# Altium PCB ZOWI_Ultrasonic.PcbDoc
Units mm, origin at the board's own origin, x right, y up, seen from the top; angles counter-clockwise.
Board outline 56.79 x 26.01 mm, 2 copper layers (Top Layer, Bottom Layer), stack 1.18 mm thick; 63 components, 43 nets, 164 pads, 61 vias.
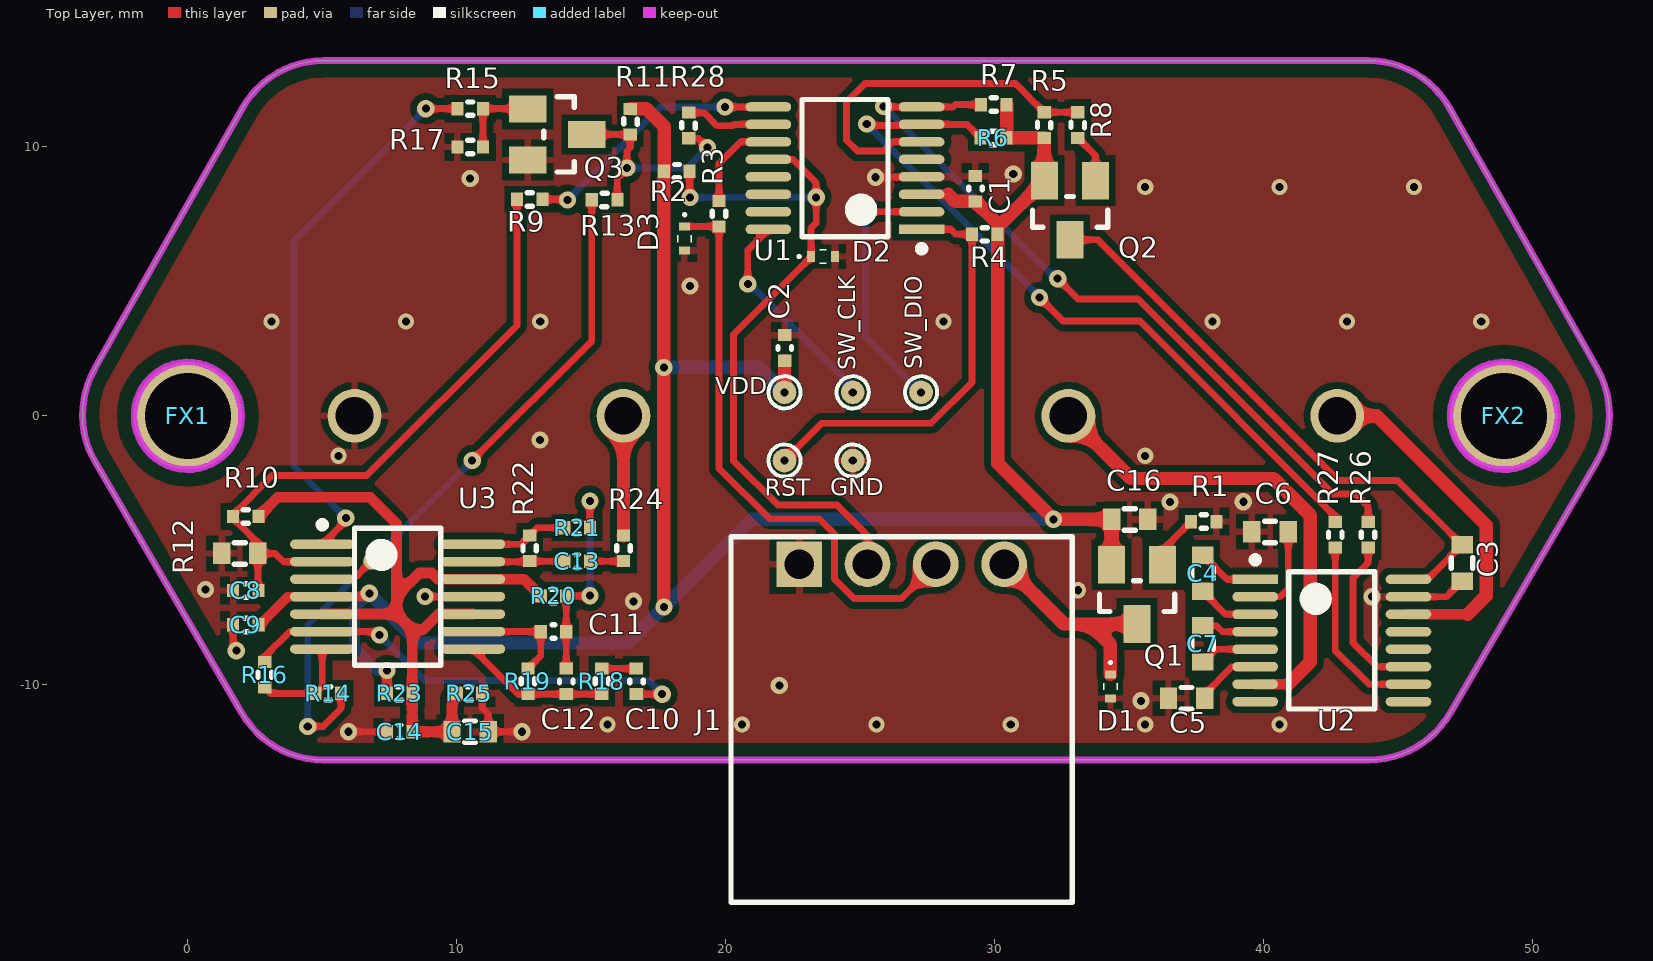
[diagram p0: Top Layer view]
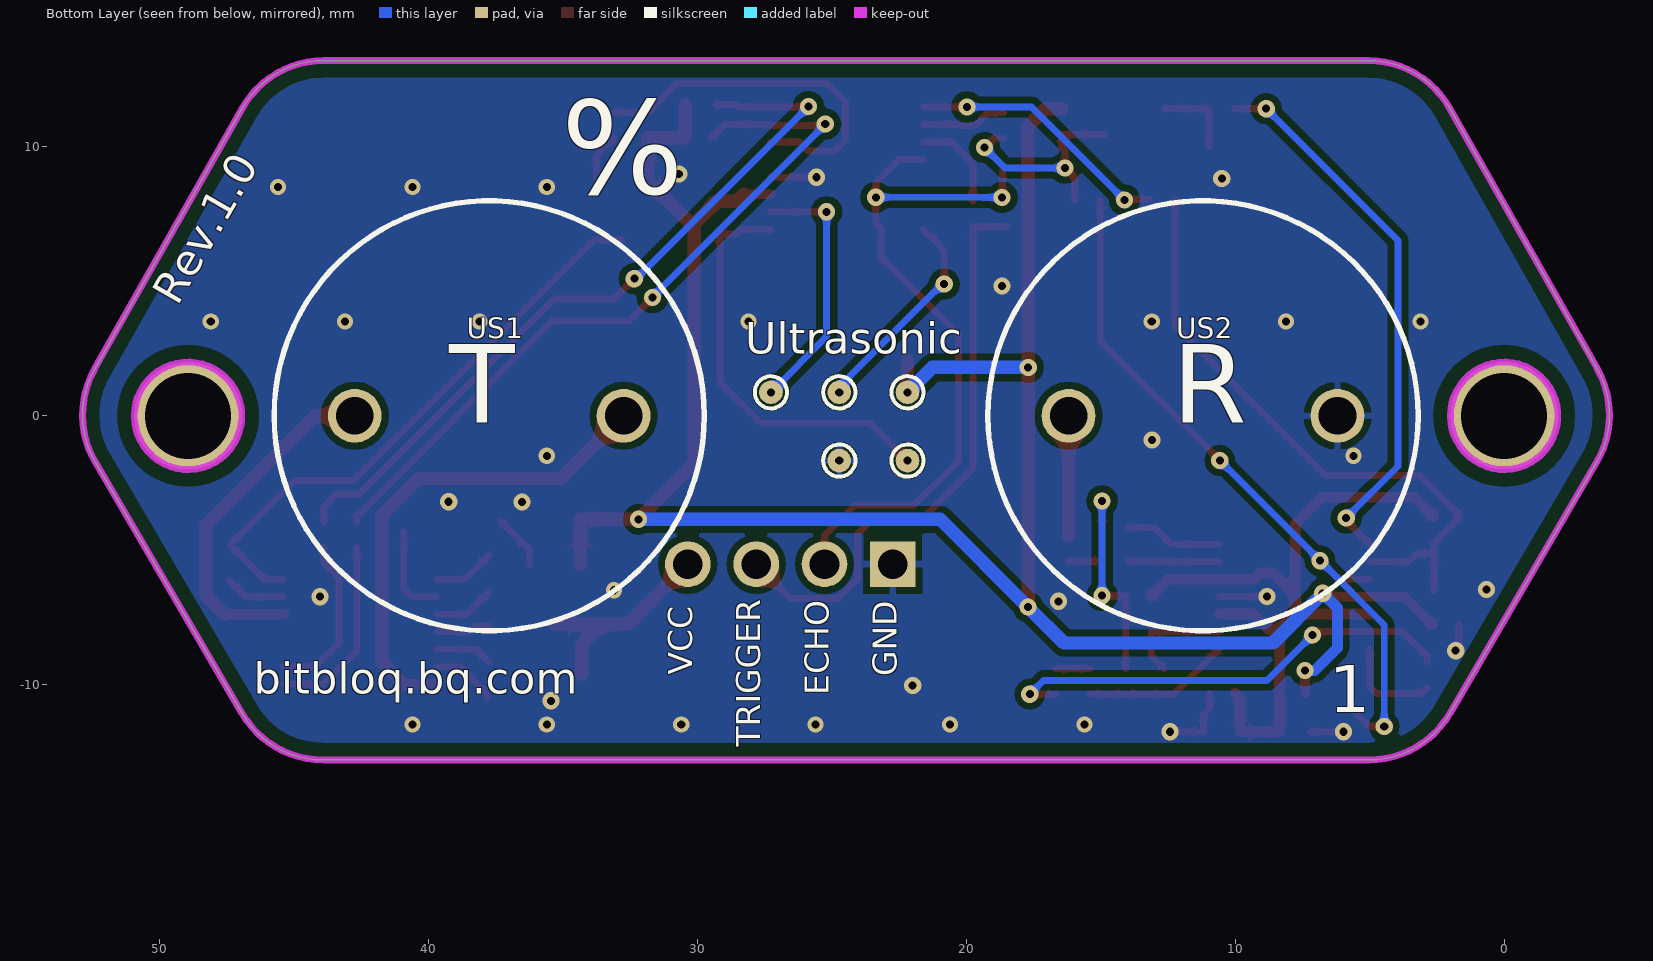
[diagram p1: Bottom Layer view, seen from below]
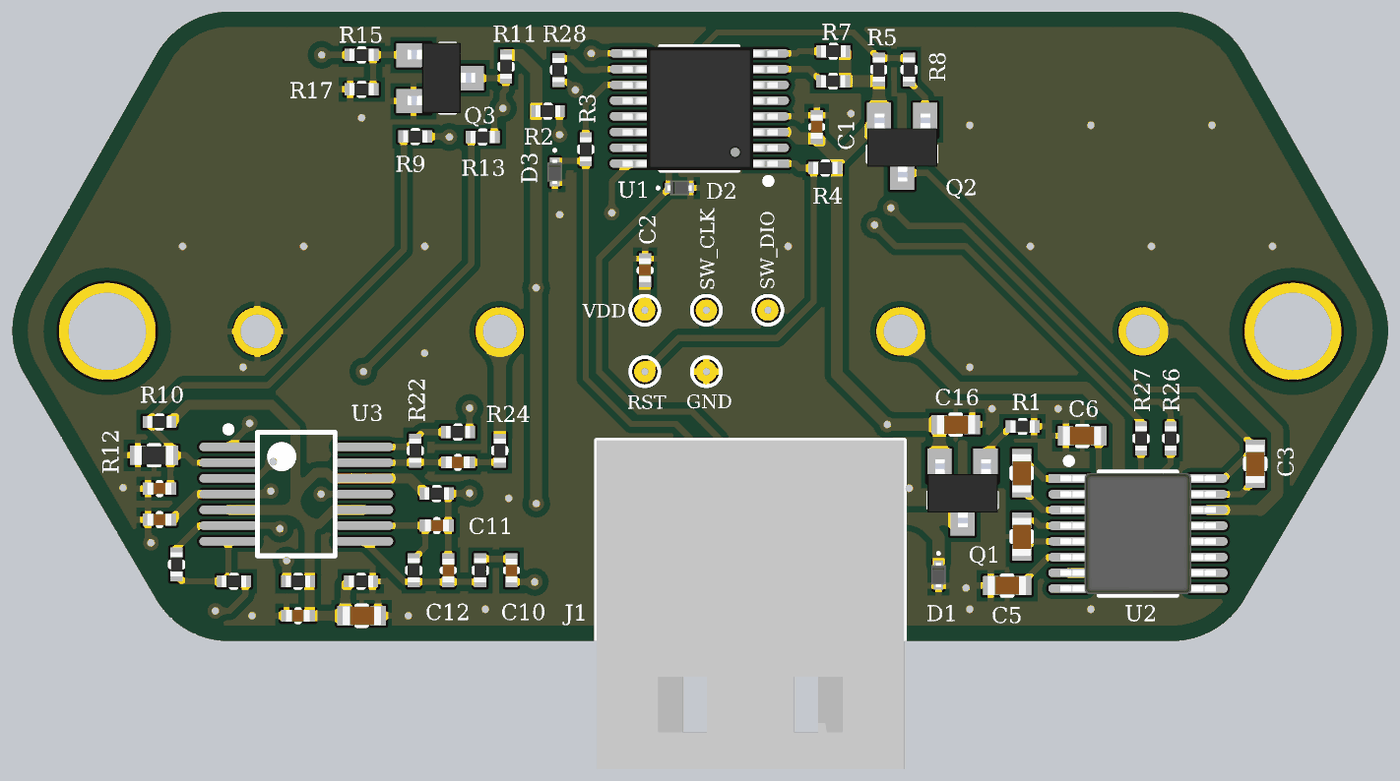
[diagram p2: 3D render of the assembled board from above, using the file's embedded part models]

## Layer stack, top to bottom
Top Solder: solder mask 0.0102, Solder Resist, Dk 3.5
Top Layer: signal copper 0.035
Dielectric 1: dielectric 1.1097, FR-4, Dk 4.8
Bottom Layer: signal copper 0.035
Bottom Solder: solder mask 0.0102, Solder Resist, Dk 3.5

## Board outline
2.021,-11.072 -3.441,-1.724 cw(c-0.436,0.031) -3.465,1.746 2.029,11.449 cw(c5.058,9.734) 5.058,13.214 43.9,13.214 cw(c43.9,9.734) 46.929,11.449 52.423,1.746 cw(c49.394,0.031) 52.399,-1.724 46.937,-11.072 cw(c43.932,-9.316) 43.932,-12.796 5.026,-12.796 cw(c5.026,-9.316)

## Design rules (kind name [scope] priority, off if disabled: settings)
Clearance Clearance_KO [OnLayer('Keep-Out Layer')] p1: gap=0.5
Clearance [All] p2: gap=0.254
HoleSize [All] p1: absolutevalues=TRUE maxlimit=3.2 minlimit=0.025 maxpercent=80.000 minpercent=20.000
MinimumSolderMaskSliver [All] p1: minsoldermaskwidth=0
PolygonConnect PolygonConnect_Via [(ViaDiameter >= 0)] p1: connectstyle=Direct reliefconductorwidth=0.254 reliefentries=4 polygonreliefangle="90 Angle" airgapwidth=0.254
PolygonConnect [All] p2: connectstyle=Relief reliefconductorwidth=0.254 reliefentries=4 polygonreliefangle="90 Angle" airgapwidth=0.254
RoutingVias [All] p1: holewidth=0.3 width=0.64 viastyle="Through Hole" minholewidth=0.2 minwidth=0.5 maxholewidth=0.3 maxwidth=0.64
SilkToSilkClearance [All] p1: silktosilkclearance=0
SilkToSolderMaskClearance [IsPad] p1: minsilkscreentomaskgap=0 clearancetoexposedcopper=TRUE
SolderMaskExpansion [All] p1: expansion=0.102
Width [All] p1: maxlimit=0.5 minlimit=0.254 preferedwidth=0.254
26 further rules are at their usual default settings.

## Classes and differential pairs
component class MCU: C1 C2 C16 D1 D2 D3 FX1 FX2 GND J1 Q1 R1 R2 R3 R4 R5 R6 R7 R26 R27 R28 RST SWD_CLK SWD_DIO U1 VDD
component class U_Ultrasonic_Receiver: C8 C9 C10 C11 C12 C13 C14 C15 Q3 R9 R10 R11 R12 R13 R14 R15 R16 R17 R18 R19 R20 R21 R22 R23 R24 R25 U3 US2
component class U_Ultrasonic_Transmitter: C3 C4 C5 C6 C7 Q2 R8 U2 US1

## Components (designator, comment, footprint, x,y, rotation, side; value= is the part's Value field where it differs from the comment)
C1 "Capacitor" C0402 29.291,8.448 r270 top
C2 "Capacitor" C0402 22.2,2.525 r270 top
C3 "Capacitor" C0603 47.392,-5.47 r90 top
C4 "Capacitor" C0603 37.749,-5.856 r90 top
C5 "Capacitor" C0603 37.149,-10.506 r0 top
C6 "Capacitor" C0603 40.25,-4.316 r0 top
C7 "Capacitor" C0603 37.749,-8.481 r90 top
C8 "Capacitor" C0402 2.155,-6.496 r0 top
C9 "Capacitor" C0402 2.155,-7.776 r0 top
C10 "Capacitor" C0402 16.683,-9.875 r90 top
C11 "Capacitor" C0402 13.6,-8.025 r180 top
C12 "Capacitor" C0402 14.075,-9.875 r90 top
C13 "Capacitor" C0402 14.475,-5.408 r0 top
C14 "Capacitor" C0402 7.875,-11.75 r0 top
C15 "Capacitor" C0603 10.5,-11.75 r180 top
C16 "Capacitor" C0603 35.031,-3.85 r180 top
D1 "ESD9B5.0ST5G" SOD923 34.314,-10.066 r90 top
D2 "ESD9L5.0ST5G" SOD923 23.625,5.925 r180 top
D3 "ESD9L5.0ST5G" SOD923 18.475,6.592 r90 top
FX1 "Fix Hole" Fix_Hole_3.2mm 0,0 r0 top
FX2 "Fix Hole" Fix_Hole_3.2mm 48.95,0 r0 top
GND "Testpoint" TP_POWER 24.731,-1.665 r270 top
J1 "1x4 MTE Angled Header 2.54mm" "1x4 MTE Angled Header 2.54mm" 22.74,-5.516 r0 top
Q1 "BSS84" SOT23-3 35.306,-6.642 r0 top
Q2 "BSS84" SOT23-3 32.811,7.648 r0 top
Q3 "FDV301N" SOT23-3 13.739,10.464 r90 top
R1 "Resistor" R0402 37.786,-3.932 r0 top
R2 "Resistor" R0402 18.188,9.1 r180 top
R3 "Resistor" R0402 19.755,7.52 r270 top
R4 "Resistor" R0402 29.643,6.752 r0 top
R5 "Resistor" R0402 31.851,10.816 r270 top
R6 "Resistor" R0402 29.963,10.336 r0 top
R7 "Resistor" R0402 29.977,11.575 r0 top
R8 "Resistor" R0402 33.099,10.816 r270 top
R9 "Resistor" R0402 12.715,8.05 r0 top
R10 "Resistor" R0402 2.155,-3.744 r180 top
R11 "Resistor" R0402 16.459,10.944 r90 top
R12 "Resistor" R0603 1.931,-5.12 r0 top
R13 "Resistor" R0402 15.499,8.032 r180 top
R14 "Resistor" R0402 5.225,-10.325 r0 top
R15 "Resistor" R0402 10.5,11.425 r0 top
R16 "Resistor" R0402 2.859,-9.632 r90 top
R17 "Resistor" R0402 10.5,10 r0 top
R18 "Resistor" R0402 15.4,-9.875 r270 top
R19 "Resistor" R0402 12.651,-9.875 r90 top
R20 "Resistor" R0402 13.6,-6.7 r180 top
R21 "Resistor" R0402 14.475,-4.16 r0 top
R22 "Resistor" R0402 12.715,-4.928 r270 top
R23 "Resistor" R0402 7.875,-10.325 r180 top
R24 "Resistor" R0402 16.203,-4.928 r90 top
R25 "Resistor" R0402 10.475,-10.325 r180 top
R26 "Resistor" R0402 43.9,-4.425 r270 top
R27 "Resistor" R0402 42.675,-4.425 r270 top
R28 "Resistor" R0402 18.625,10.8 r90 top
RST "Testpoint" TP_POWER 22.191,-1.665 r270 top
SW_CLK "Testpoint" TP_POWER 24.731,0.875 r270 top (schematic designator SWD_CLK)
SW_DIO "Testpoint" TP_POWER 27.271,0.875 r270 top (schematic designator SWD_DIO)
U1 "MKE04Z8VTG4" TSSOP16#1 24.441,9.214 r90 top
U2 "MAX232EIPWR" TSSOP16#2 42.549,-8.356 r0 top
U3 "LM324PWR" TSSOP14 7.8,-6.725 r0 top
US1 "Ultrasonic" NU40C16 42.75,0 r180 bottom
US2 "Ultrasonic" NU40C16 16.2,0 r180 bottom
VDD "Testpoint" TP_POWER 22.191,0.875 r270 top

## Footprints (in the part's own frame and the unit in brackets; to place one, negate y for a bottom-side part, rotate by r counter-clockwise, add the part's x,y. Pads: shape width x height; smd on the part's side, far side on the other; paste and mask are expansions set on the pad)
"1x4 MTE Angled Header 2.54mm" [mm] "1x4 MTE Angled Header 2.54mm"
  rect 1.7x1.7 hole 1.1: 1(0,0)
  round 1.7 hole 1.1: 2(2.54,0) 3(5.08,0) 4(7.62,0)
  silkscreen extent -2.54,-12.57 10.16,1.02, body extent -2.54,-12.57 10.16,1.02, height 6.96
C0402 [mm] "Chip Capacitor, Body 1.0x0.5mm, IPC High Density"
  rect 0.45x0.5 smd: 1(-0.475,0) 2(0.475,0)
  silkscreen extent -0.05,-0.25 0.05,0.25, body extent -0.51,-0.25 0.49,0.25, height 0.5
C0603 [mm] "Chip Capacitor, Body 1.6x0.8mm, IPC High Density"
  rect 0.65x0.8 smd: 1(-0.675,0) 2(0.675,0)
  silkscreen extent -0.2,-0.4 0.2,0.4, body extent -0.81,-0.4 0.79,0.4, height 0.6
Fix_Hole_3.2mm [mm] "Fix Hole for screwing"
  round 4 hole 3.2: 1(0,0)
NU40C16 [mm] "Ceramic Ultrasonic Sensor"
  round 2 hole 1.4 mask+0.05: 1(0,0) 2(10,0)
  silkscreen extent -3,-8 13,8, body extent -2.98,-8 13.01,8, height 12
R0402 [mm] "Chip Resistor, Body 1.0x0.5mm, IPC High Density"
  rect 0.45x0.5 smd: 1(-0.475,0) 2(0.475,0)
  silkscreen extent -0.1,-0.25 0.1,0.25, body extent -0.5,-0.25 0.5,0.25, height 0.3
R0603 [mm] "Chip Resistor, Body 1.6x0.8mm, IPC High Density"
  rect 0.65x0.8 smd: 1(-0.675,0) 2(0.675,0)
  silkscreen extent -0.2,-0.4 0.2,0.4, body extent -0.81,-0.4 0.79,0.4, height 0.4
SOD923 [mm] "SOD923, 2-Leads, Body 0,80x0,60mm, IPC Medium Density"
  rect 0.3x0.4 smd: A(-0.45,0) K(0.45,0)
  silkscreen extent -0.13,-0.25 0.94,0.25, body extent -0.5,-0.3 0.5,0.3, height 0.4
SOT23-3 [mm] "SOT23, 3-Leads, Body 2.9x1.3mm, Pitch 0.95mm, Lead Span 2.5mm, IPC High Density"
  rect 1x1.4 smd: 1(0.95,1.1) 2(-0.95,1.1) 3(0,-1.1)
  silkscreen extent -1.4,-0.64 1.4,0.51, body extent -1.44,-1.45 1.46,1.35, height 1.07
TP_POWER [mm] "Testpoint 0.3mm"
  round 0.88 / inner round 0.74 / far side round 0.88 hole 0.3 paste-0.425: 1(0,0)
  silkscreen extent -0.6,-0.6 0.6,0.6, body extent -0.41,-0.41 0.41,0.41, height 0.1
TSSOP14 [mm]
  oval 2.4x0.35 smd: 1(-2.8,1.95) 2(-2.8,1.3) 3(-2.8,0.65) 4(-2.8,0) 5(-2.8,-0.65) 6(-2.8,-1.3) 7(-2.8,-1.95) 8(2.8,-1.95) 9(2.8,-1.3) 10(2.8,-0.65) 11(2.8,0) 12(2.8,0.65) 13(2.8,1.3) 14(2.8,1.95)
  silkscreen extent -2.92,-2.55 1.6,2.8, body extent -2.25,-2.55 2.25,2.55, height 1.05
TSSOP16#1 [mm] "TSSOP, 16-Leads, Body 5.0x4.4mm, Pitch 0.65mm"
  rect 0.35x1.7 smd: 1(-2.275,-2.85)
  oval 0.35x1.7 smd: 2(-1.625,-2.85) 3(-0.975,-2.85) 4(-0.325,-2.85) 5(0.325,-2.85) 6(0.975,-2.85) 7(1.625,-2.85) 8(2.275,-2.85) 9(2.275,2.85) 10(1.625,2.85) 11(0.975,2.85) 12(0.325,2.85) 13(-0.325,2.85) 14(-0.975,2.85) 15(-1.625,2.85) 16(-2.275,2.85)
  silkscreen extent -3.12,-2.98 2.55,1.6, body extent -2.56,-3.23 2.54,3.17, height 1.2
TSSOP16#2 [mm] "TSSOP 16 leads, 5.0x4.4, lead space 0.65"
  rect 1.7x0.35 smd: 1(-2.85,2.275)
  oval 1.7x0.35 smd: 2(-2.85,1.625) 3(-2.85,0.975) 4(-2.85,0.325) 5(-2.85,-0.325) 6(-2.85,-0.975) 7(-2.85,-1.625) 8(-2.85,-2.275) 9(2.85,-2.275) 10(2.85,-1.625) 11(2.85,-0.975) 12(2.85,-0.325) 13(2.85,0.325) 14(2.85,0.975) 15(2.85,1.625) 16(2.85,2.275)
  silkscreen extent -2.97,-2.55 1.6,3.12, body extent -3.21,-2.5 3.21,2.5, height 0.98

## Part data
C1 C2 C9 C14: library part C0402_100nF_16V_±10%, "Capacitor SMD"
C3 C4 C5 C6 C7 C15: library part C0603_1uF_16V_±10%, "Capacitor SMD"
C8 C10 C13: library part C0402_10nF_16V_±10%, "Capacitor SMD"
C11 C12: library part C0402_1nF_16V_±10%, "Capacitor SMD"
C16: library part C0603_10uF_16V_±20%, "Capacitor SMD"
D1: library part "TVS 5Vdc Bidir", "Protection, Bidirectional Transient Suppression Diodes"
D2 D3: library part "TVS 5Vdc Low Cap", "Protection, Transient Suppression Diode"
FX1 FX2: library part FX_3.2
GND RST SW_CLK SW_DIO VDD: library part TP_POWER
J1: library part CON_MTE_Angled_HDR_THT2.54_4, "Connector, 1x4 MTE Angled Header 2.54mm"
Q1 Q2: "PFET"
Q3: "NFET"
R1 R2 R4 R5 R6 R7 R11 R15 R18 R24: library part R0402_10k_0.063W_±5%, "Resistor, SMD"
R3 R8 R20: library part R0402_1k_0.063W_±5%, "Resistor, SMD"
R9: library part R0402_75k_0.063W_±5%, "Resistor, SMD"
R10 R13: library part R0402_120k_0.063W_±5%, "Resistor, SMD"
R12: library part R0603_1M_0.1W_±5%, "Resistor, SMD"
R14 R17 R21: library part R0402_3k9_0.063W_±5%, "Resistor, SMD"
R16 R22: library part R0402_56k_0.063W_±5%, "Resistor, SMD"
R19: library part R0402_20k_0.063W_±5%, "Resistor, SMD"
R23 R25: library part R0402_10k_0.063W_±1%, "Resistor, SMD"
R26 R27 R28: library part R0402_220R_0.063W_±5%, "Resistor, SMD"
U1: "Processor, 32-bit microcontroller"
U2: "Dual RS-232 Driver/Receiver"
U3: "Operational Amplifier Quadruple"
US1: library part NU40C16T-2, "Ultrasonic Sensor"
US2: library part NU40C16R-2, "Ultrasonic Sensor"

## Via types
v1: diameter 0.64, hole 0.3, Top Layer to Bottom Layer, 42 vias
v2: diameter 0.6, hole 0.3, Top Layer to Bottom Layer, 19 vias

## Nets (pads, with @x,y where several pads share a name; then routed paths per layer and width w, separated by ;. In a path a pad name is that pad's centre, name@x,y a point inside that pad or via, vN(x,y) a via of type N, cw(c..) or ccw(c..) an arc to the next point about the centre after c; other vN are vias at no path point)
5V: C1.2 C2.2 C9.2 C16.2 Q1.2 Q2.2 R2.2 R4.2 R5.2 R6.2 R7.2 R11.2 R23.2 U1.3 U3.4 VDD.1 | length 88.5
  Top Layer w0.35: C9.2 2.672,-7.776 3.723,-6.725 U3.4 6.625,-6.725 v1(6.75,-6.6) ; R23.2 7.403,-10.322 v1(7.403,-9.472) ; U1.3 28.236,8.239
  Top Layer w0.5: R11.2 17.056,11.419 17.713,10.762 R2.2 ; v1@17.704,-7.114 v1(17.704,1.8) R2.2@17.704,9.16 ; VDD.1 C2.2@22.191,2.041 ; 28.276,8.239 28.542,7.973 C1.2 30.118,7.146 ; R7.2 30.452,10.35 30.461,10.341 R5.2 31.851,8.758 Q2.2 30.259,7.146 30.118,7.146 ; Q1.2 C16.2 v1(32.2,-3.85) 30.118,-1.768 R4.2 30.118,7.146
  Bottom Layer w0.4: v1(6.75,-6.6) 6.2,-7.15 6.2,-8.625 7.047,-9.472 v1(7.403,-9.472)
  Bottom Layer w0.5: v1(6.75,-6.6) 8.599,-8.45 16.371,-8.45 v1(17.707,-7.114) 20.971,-3.85 v1(32.2,-3.85) ; v1(17.704,1.8) 21.266,1.8 VDD.1
#RESET: R4.1 RST.1 U1.1 | length 15.7
  Top Layer w0.254: RST.1 23.581,-0.275 27.65,-0.275 29.168,1.243 R4.1 28.573,6.752 28.386,6.939 U1.1 U1.1@27.291,6.891
ECHO: D2.K J1.2 R2.1 U1.12 | length 26.7
  Top Layer w0.254: R2.1 18.663,8.137 v1(18.675,8.125) ; U1.12 22.504,9.539 23.371,8.672 v1(23.371,8.128) 23.371,7.168 23.181,6.978 23.181,5.906 20.3,3.025 20.3,-1.675 21.942,-3.317 24.142,-3.317 25.28,-4.455 J1.2
  Bottom Layer w0.254: v1(18.675,8.125) 19.375,8.125 19.378,8.128 v1(23.371,8.128) v1@23.344,8.101
EN_TRANSMITTER: R5.1 R8.1 U1.6 | length 13.8
  Top Layer w0.254: U1.6 26.214,10.189 25.875,9.85 24.9,9.85 24.5,10.25 24.5,11.675 25.181,12.356 30.786,12.356 R5.1 R8.1
GND: C1.1 C2.1 C3.1 C5.1 C6.1 C8.1 C9.1 C14.1 C15.1 C16.1 D1.A D2.A D3.A GND.1 J1.1 Q3.2 R1.2 R12.1 R17.1 R25.1 U1.4 U2.15 U3.11 US2.2 | length 10.8
  Top Layer w0.254: C9.1 1.68,-8.613 v1(1.803,-8.736) ; v1(5.975,-11.75) C14.1@7.2,-11.75 ; v1(8.825,-6.725) U3.11 ; R25.1 10.95,-10.875 11.179,-11.104 11.179,-11.696 11.15,-11.725 C15.1 v1(12.425,-11.75) ; v1(25.575,8.875) 27.277,8.875 U1.4 ; U2.15 46.807,-6.731 C3.1
  other v1: 35.45,-10.6 22,-10.025 16.575,-6.9 44.042,-6.727 0.651,-6.464 36.525,-3.2 39.258,-3.196 13.1,-0.9 18.675,4.825 10.5,8.825 30.7,9
  other v2: 15.607,-11.486 20.607,-11.486 25.607,-11.486 30.607,-11.486 35.607,-11.486 40.607,-11.486 33.107,-6.486 5.607,-1.486 35.607,-1.486 3.107,3.514 8.107,3.514 13.107,3.514 28.107,3.514 38.107,3.514 43.107,3.514 48.107,3.514 35.607,8.514 40.607,8.514 45.607,8.514
IN_REC: R28.2 U1.10 | length 3.2
  Top Layer w0.254: R28.2 19.201,11.275 19.689,10.787 20.269,10.787 20.321,10.839 U1.10
NetC3_2: C3.2 Q2.3 U2.16 | length 21.8
  Top Layer w0.254: Q2.3 33.852,6.548 42.8,-2.4 44.997,-2.4 C3.2 46.107,-6.081 U2.16
NetC4_1: C4.1 U2.3 | length 2.3
  Top Layer w0.254: C4.1 38.599,-7.381 U2.3
NetC4_2: C4.2 U2.1 | length 2.3
  Top Layer w0.254: C4.2 38.649,-6.081 U2.1
NetC5_2: C5.2 U2.6 | length 2.5
  Top Layer w0.254: C5.2 37.824,-10.344 38.838,-9.331 U2.6
NetC6_2: C6.2 U2.2 | length 3.5
  Top Layer w0.254: U2.2 40.613,-6.731 40.93,-6.413 40.93,-4.321 C6.2
NetC7_1: C7.1 U2.5 | length 2.1
  Top Layer w0.254: C7.1 38.224,-8.681 U2.5
NetC7_2: C7.2 U2.4 | length 2
  Top Layer w0.254: C7.2 38.249,-7.806 38.474,-8.031 U2.4
NetC8_2: C8.2 R9.1 R10.2 R12.2 U3.2 | length 23.9
  Top Layer w0.254: C8.2 2.606,-6.472 R12.2 ; U3.2 3.548,-5.425 3.243,-5.12 R12.2 ; R9.1 12.24,3.365 6.65,-2.225 3.135,-2.225 1.68,-3.68 R10.2 1.68,-3.808 2.606,-4.734 R12.2
NetC10_1: C10.1 R16.2 U3.6 | length 17.3
  Top Layer w0.254: R16.2 2.859,-8.96 3.794,-8.025 U3.6 6.999,-8.025 v1(7.125,-8.15) ; C10.1@16.683,-10.348 16.688,-10.353 v1(17.643,-10.353)
  Bottom Layer w0.254: v1(7.125,-8.15) 8.815,-9.841 17.131,-9.841 v1(17.643,-10.353)
NetC10_2: C10.2 R18.1 | length 1.3
  Top Layer w0.254: R18.1 C10.2
NetC11_1: C11.1 C12.2 R20.1 R21.2 | length 8.1
  Top Layer w0.254: C12.2 C11.1 R20.1 14.943,-6.7 v1(14.955,-6.688) ; R21.2 14.955,-4.155 v1(14.955,-3.168)
  Bottom Layer w0.254: v1(14.955,-6.688) v1(14.955,-3.168)
NetC11_2: C11.2 R19.2 U3.9 | length 4.1
  Top Layer w0.254: U3.9 C11.2 13.125,-8.926 R19.2
NetC13_1: C13.1 R22.2 U3.13 | length 3.4
  Top Layer w0.254: U3.13 R22.2@12.715,-5.425 ; R22.2 12.72,-5.408 C13.1
NetC13_2: C13.2 R24.1 | length 1.3
  Top Layer w0.254: C13.2 16.198,-5.408 R24.1
NetD1_K: D1.K J1.4 Q1.3 | length 8.1
  Top Layer w0.5: J1.4 32.585,-7.742 33.542,-7.742 ; D1.K 34.314,-8.514 33.542,-7.742 ; Q1.3 33.542,-7.742
NetD3_K: D3.K J1.3 R3.2 | length 21.9
  Top Layer w0.254: D3.K@18.475,7.045 R3.2 19.755,-1.955 21.625,-3.825 23.475,-3.825 24.049,-4.399 24.049,-6.074 24.775,-6.8 26.536,-6.8 J1.3
NetQ1_1: Q1.1 R1.1 | length 2
  Top Layer w0.254: Q1.1 36.256,-4.987 R1.1
NetQ2_1: Q2.1 R8.2 | length 1.9
  Top Layer w0.254: R8.2 33.761,9.679 Q2.1
NetQ3_1: Q3.1 R15.2 R17.2 | length 3.1
  Top Layer w0.254: R17.2 R15.2 12.628,11.425 Q3.1
NetQ3_3: Q3.3 R11.1 R13.1 R28.1 | length 8.4
  Top Layer w0.254: Q3.3 16.454,10.464 16.454,9.979 16.331,9.856 v1(16.331,9.216) 15.974,8.859 R13.1 ; R28.1 18.975,10.325 v1(19.325,9.975)
  Bottom Layer w0.254: v1(16.331,9.216) 18.566,9.216 v1(19.325,9.975)
NetR13_2: R13.2 R14.2 U3.3 | length 28.2
  Top Layer w0.254: v1(4.459,-11.552) 5.035,-11.552 5.7,-10.887 R14.2 ; U3.3 6.161,-6.075 v1(6.85,-5.386) ; v1(10.575,-1.661) 15.024,2.788 R13.2
  Bottom Layer w0.254: v1(4.459,-11.552) 4.459,-7.777 v1(6.85,-5.386) v1(10.575,-1.661)
NetR24_2: R24.2 US2.1 | length 4.5
  Top Layer w0.5: R24.2@16.2,-4.45 R24.2 16.203,-0.003 US2.1
NetR26_2: R26.2 U2.11 | length 6.2
  Top Layer w0.254: R26.2 43.9,-5.466 43.341,-6.026 43.341,-8.441 44.231,-9.331 U2.11
NetR27_2: R27.2 U2.10 | length 7.1
  Top Layer w0.254: R27.2 42.675,-8.725 43.931,-9.981 U2.10
NetU2_7: U2.7 US1.2 | length 18.4
  Top Layer w0.4: U2.7 40.924,-9.981
  Top Layer w0.5: US1.2 35.081,-2.331 40.378,-2.331 41.754,-3.707 41.754,-9.151 40.924,-9.981
NetU2_14: U2.14 US1.1 | length 12.7
  Top Layer w0.4: U2.14 47.599,-7.381
  Top Layer w0.5: US1.1@43.1,0 44.225,0 48.296,-4.071 48.296,-6.684 47.599,-7.381
OUT_REC: R9.2 U1.9 | length 9.8
  Top Layer w0.254: R9.2 14.105,8.05 v1(14.123,8.032) ; v1(19.979,11.488) 21.59,11.488 U1.9
  Bottom Layer w0.254: v1(14.123,8.032) 17.579,11.488 v1(19.979,11.488)
OUTA: R15.1 U3.1 | length 20.6
  Top Layer w0.254: U3.1 5.925,-3.85 v1(5.875,-3.8) ; v1(8.85,11.425) R15.1
  Bottom Layer w0.254: v1(5.875,-3.8) 3.95,-1.875 3.95,6.525 v1(8.85,11.425)
OUTB: R14.1 R16.1 U3.7 | length 3.7
  Top Layer w0.254: R16.1 3.077,-10.325 R14.1 5,-10.075 U3.7
OUTC: C12.1 R18.2 R19.1 U3.8 | length 5.7
  Top Layer w0.254: U3.8@10.764,-8.675 U3.8 12.275,-10.35 R19.1 C12.1 R18.2
OUTD: R21.1 R22.1 U3.14 | length 3.7
  Top Layer w0.254: U3.14 12.393,-4.775 R22.1 13.008,-4.16 R21.1
PULSES_1: R7.1 R26.1 U1.8 | length 28.2
  Top Layer w0.254: v1(25.875,11.5) 25.886,11.489 U1.8 28.464,11.489 28.55,11.575 R7.1@29.302,11.575 ; v1(32.352,5.1) 33.102,4.35 35.332,4.35 42.59,-2.908 43.433,-2.908 43.9,-3.375 R26.1
  Bottom Layer w0.254: v1(25.875,11.5) 32.275,5.1 v1(32.352,5.1)
PULSES_2: R6.1 R27.1 U1.7 | length 28.2
  Top Layer w0.254: v1(25.25,10.85) 25.301,10.799 27.291,10.799 U1.7 28.985,10.839 R6.1 ; v1(31.675,4.4) 32.55,3.525 35.415,3.525 42.675,-3.735 R27.1
  Bottom Layer w0.254: v1(25.25,10.85) 31.675,4.425 v1(31.675,4.4)
SWD_CLK: SW_CLK.1 U1.16 | length 8
  Top Layer w0.254: v1(20.826,4.9) 20.826,6.174 U1.16
  Bottom Layer w0.254: v1(20.826,4.9) 20.903,4.9 SW_CLK.1@24.83,0.974
SWD_DIO: SW_DIO.1 U1.2 | length 9.7
  Top Layer w0.254: v1(25.2,7.589) U1.2
  Bottom Layer w0.254: v1(25.2,7.589) 25.2,2.946 SW_DIO.1
TRIGGER: R3.1 U1.11 | length 3.6
  Top Layer w0.254: R3.1 19.755,9.389 20.555,10.189 U1.11
VREF: C14.2 C15.2 R10.1 R20.2 R23.1 R25.2 U3.5 U3.10 U3.12 | length 27.9
  Top Layer w0.4: R10.1 3.348,-3.026 6.776,-3.026 7.765,-4.015 7.765,-6.691 ; U3.5 7.765,-7.375 ; C14.2 R23.1 8.35,-7.96 ; C14.2@8.55,-11.75 C15.2 9.825,-10.5 R25.2 ; U3.10 9.335,-7.375 8.75,-7.96 8.35,-7.96 ; R20.2 12.507,-6.082 12.157,-6.082 12.15,-6.075 U3.12 9.3,-6.075 9.068,-5.843 8.613,-5.843 7.765,-6.691 ; 7.765,-7.375 7.765,-6.691 ; 7.765,-7.375 8.35,-7.96
pads on no net: FX1.1 FX2.1 U1.5 U1.13 U1.14 U1.15 U2.8 U2.9 U2.12 U2.13

## Polygon pours and split planes (outlines as drawn)
GND on Top Layer "Top Layer - GND" (solid, remove dead copper, pour order 4): -3.925,13.225 52.885,13.225 52.885,-12.8 -3.925,-12.8
GND on Bottom Layer "Bottom Layer - GND" (solid, remove dead copper, pour order 3): -3.95,13.225 52.875,13.225 52.875,-12.796 -3.95,-12.796

## Keep-outs
Keep-Out Layer:
  circle w0.254: c0,0 r2
  circle w0.254: c48.95,0 r2
  lines w0.254: -3.465,1.746 ccw(c-0.436,0.031) -3.441,-1.724 2.021,-11.072 ccw(c5.026,-9.316) 5.026,-12.796 43.932,-12.796 ccw(c43.932,-9.316) 46.937,-11.072 52.399,-1.724 ccw(c49.394,0.031) 52.423,1.746 46.929,11.449 ccw(c43.9,9.734) 43.9,13.214 5.058,13.214 ccw(c5.058,9.734) 2.029,11.449 -3.465,1.746

## Silkscreen, mask and mechanical layers (free items; w line width, h text height)
Bottom Overlay:
  text "%" at 35.075,7.1 h6
  text "Rev.1.0" at 48.998,3.85 h2 r300
  text "Ultrasonic" at 28.225,1.925 h2
  text "R" at 12.343,-1.225 h5
  text "T" at 39.243,-1.225 h5
  text "VCC" at 29.909,-9.623 h1.52 r270
  text "GND" at 22.289,-9.691 h1.52 r270
  text "ECHO" at 24.829,-10.387 h1.52 r270
  text "bitbloq.bq.com" at 46.499,-10.722 h2
  text "1" at 6.5,-11.6 h3
  text "TRIGGER" at 27.369,-12.302 h1.52 r270
Mechanical 1:
  circle w0.254: c0,0 r2
  circle w0.254: c48.95,0 r2
  lines w0.254: -3.465,1.746 ccw(c-0.436,0.031) -3.441,-1.724 2.021,-11.072 ccw(c5.026,-9.316) 5.026,-12.796 43.932,-12.796 ccw(c43.932,-9.316) 46.937,-11.072 52.399,-1.724 ccw(c49.394,0.031) 52.423,1.746 46.929,11.449 ccw(c43.9,9.734) 43.9,13.214 5.058,13.214 ccw(c5.058,9.734) 2.029,11.449 -3.465,1.746

## Dimensions
5.026,-12.796 to 5.058,13.214 on Mechanical 1
0,0 to 48.95,0 on Mechanical 1
-3.916,0.031 to 52.874,0.031 on Mechanical 1